# Altium PCB PCB1.PcbDoc
Units mm, origin at the board's own origin, x right, y up, seen from the top; angles counter-clockwise.
Board outline 152.4 x 101.6 mm, 2 copper layers (Top Layer, Bottom Layer); 6 components, 4 nets, 12 pads, 28 vias.
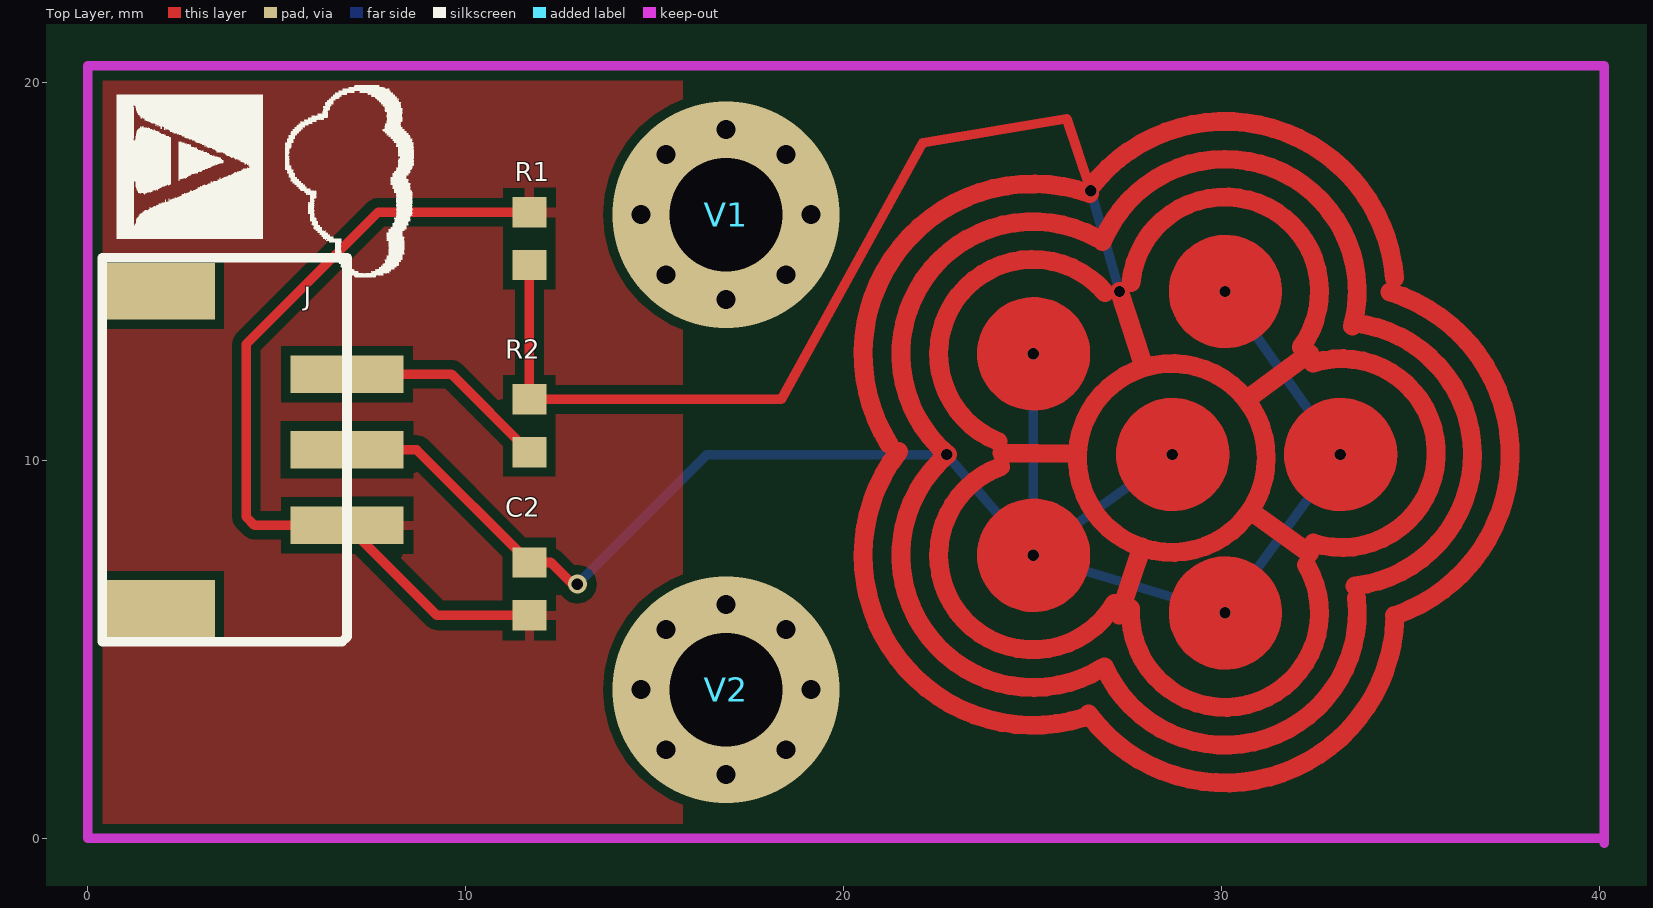
[diagram p0: Top Layer view]
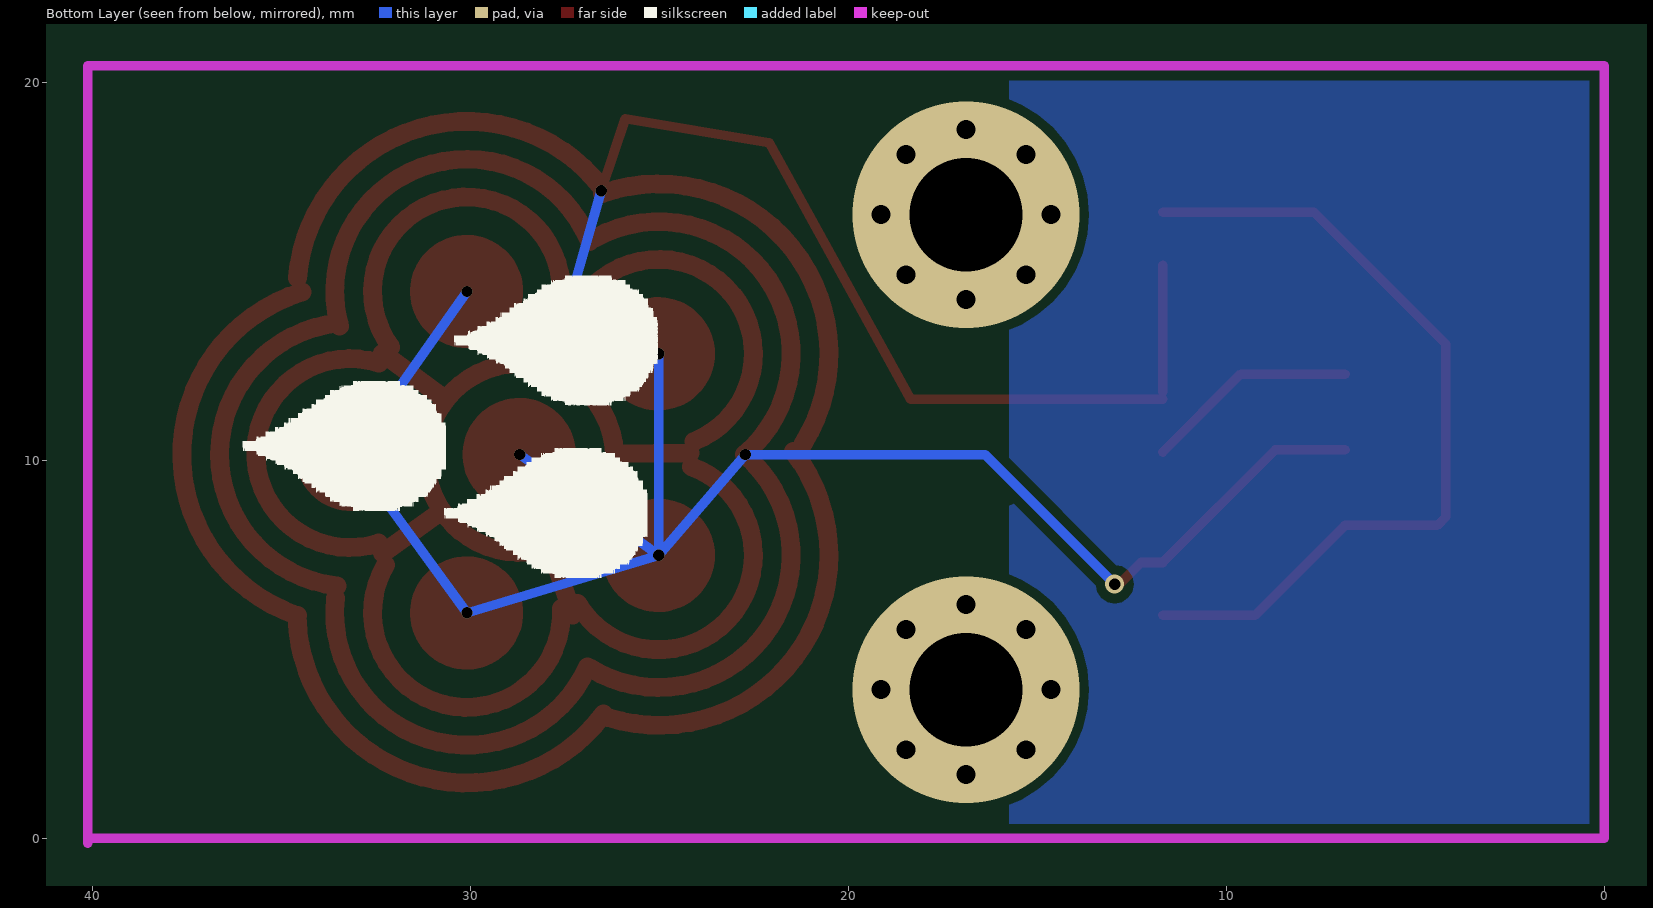
[diagram p1: Bottom Layer view, seen from below]

## Layer stack, top to bottom
Top Layer: signal copper 0.0356
Dielectric: dielectric 0.32, FR-4, Dk 4.8
Bottom Layer: signal copper 0.0356

## Board outline
-37.084,-41.275 115.316,-41.275 115.316,60.325 -37.084,60.325

## Design rules (kind name [scope] priority, off if disabled: settings)
Clearance [All] p1: gap=0.254
PolygonConnect [All] p1: connectstyle=Relief reliefconductorwidth=0.254 reliefentries=4 polygonreliefangle="90 Angle"
RoutingVias [All] p1: holewidth=0.711 width=1.27 viastyle="Through Hole" minholewidth=0.711 minwidth=1.27 maxholewidth=0.711 maxwidth=1.27
SilkscreenOverComponentPads [All] p1: minsilkscreentomaskgap=0.254
SolderMaskExpansion [All] p1: expansion=0.102
Width [All] p1: maxlimit=0.254 minlimit=0.254 preferedwidth=0.254
27 further rules are at their usual default settings.

## Components (designator, comment, footprint, x,y, rotation, side; value= is the part's Value field where it differs from the comment)
C2 "32pF" 1608[0603] 11.684,6.604 r90 top
J "sh-2.0" sh-2.0 6.858,10.287 r270 top
R1 "100K" 1608[0603] 11.684,15.875 r270 top
R2 "470" 1608[0603] 11.684,10.922 r270 top
V1 "Via" VIA 16.891,16.51 r0 top
V2 "Via" VIA 16.891,3.937 r0 top

## Footprints (in the part's own frame and the unit in brackets; to place one, negate y for a bottom-side part, rotate by r counter-clockwise, add the part's x,y. Pads: shape width x height; smd on the part's side, far side on the other; paste and mask are expansions set on the pad)
1608[0603] [mm] "Chip Capacitor, Body 1.6x0.8mm, IPC High Density"
  rect 0.8x0.9 smd: 1(-0.7,0) 2(0.7,0)
  body extent -0.87,-0.48 0.87,0.48, height 1.3
sh-2.0 [mm]
  rect 1x3 smd: 1(-2,0) 2(0,0) 3(2,0) 3(2,0)
  rect 1.5x3 smd: GND(-4.2,-5) GND(4.2,-5)
  silkscreen extent -5.08,-6.48 5.08,0
VIA [mm]

## Part data
C2: library part CAP
R1 R2: library part RES

## Via types
v1: diameter 1, hole 0.5, Top Layer to Bottom Layer, 16 vias
v2: diameter 0.3, hole 0.3, Top Layer to Bottom Layer, 9 vias
v3: diameter 6, hole 3, Top Layer to Bottom Layer, 2 vias
v4: diameter 0.5, hole 0.3, Top Layer to Bottom Layer, 1 vias

## Nets (pads, with @x,y where several pads share a name; then routed paths per layer and width w, separated by ;. In a path a pad name is that pad's centre, name@x,y a point inside that pad or via, vN(x,y) a via of type N, cw(c..) or ccw(c..) an arc to the next point about the centre after c; other vN are vias at no path point)
GND: C2.1 J.3 R1.1 | length 22.1
  Top Layer w0.254: C2.1 9.241,5.904 6.858,8.287 4.413,8.287 4.191,8.509 4.191,13.081 7.685,16.575 R1.1
NetC1_1: R1.2 R2.1 | length 154.1
  Top Layer w0.254: R2.1 18.353,11.622 22.098,18.415 25.908,19.05 26.522,17.208 v2(26.543,17.145) ; R2.1@11.684,11.811 R1.2
  Top Layer w0.5: 21.203,10.442 cw(c25.019,12.827) v2@26.517,17.07 ; 21.458,10.245 ccw(c25.019,7.493) 26.361,3.198 ; 24.091,10.506 cw(c25.019,12.827) 26.917,14.454 ; 24.155,9.839 ccw(c25.019,7.493) 27.174,6.225 ; 24.19,10.198 26.163,10.181 ; 26.484,3.289 ccw(c30.099,5.969) 34.598,5.862 ; v2@26.499,17.178 cw(c30.099,14.478) 26.522,17.208 cw(c30.099,14.478) 34.585,14.832 ; 27.299,5.918 27.895,7.72 ; v2(27.305,14.478) 27.902,12.641 ; 27.602,6.085 ccw(c30.099,5.969) 32.254,7.237 ; 27.61,14.715 cw(c30.099,14.478) 32.115,13 ; 30.801,8.652 32.331,7.553 ; 30.805,11.715 32.331,12.843 ; 32.429,12.579 cw(c33.19,10.198) 32.436,7.814 ; 34.471,14.461 cw(c33.147,10.16) 34.586,5.896 ; 31.19,10.071 ccw(c28.69,10.071) 31.19,10.071
  Bottom Layer w0.254: v2(26.543,17.145) v2(27.305,14.478)
NetC1_2: C2.2 J.2 | length 127.7
  Top Layer w0.254: J.2 8.701,10.287 C2.2 12.254,7.304 12.827,6.731 v4(12.954,6.731)
  Top Layer w0.5: 26.706,15.894 ccw(c25.019,12.827) 22.752,10.16 ccw(c25.019,7.493) 26.853,4.512 ; 26.86,15.803 cw(c30.099,14.478) 33.498,13.642 ; 26.906,4.536 ccw(c30.099,5.969) 33.578,6.355 ; 33.476,13.557 ccw(c30.099,14.478) 33.498,13.642 ; 33.484,13.644 cw(c33.147,10.16) 33.498,13.642 ; 33.541,6.682 ccw(c33.147,10.16) 33.498,13.642
  Top Layer w1.5: 25.781,7.493 ccw(c25.031,7.493) 25.781,7.493 ; 25.781,12.827 ccw(c25.031,12.827) 25.781,12.827 ; 29.464,10.16 ccw(c28.714,10.16) 29.464,10.16 ; 30.861,5.969 ccw(c30.111,5.969) 30.861,5.969 ; 30.861,14.478 ccw(c30.111,14.478) 30.861,14.478 ; 33.909,10.16 ccw(c33.159,10.16) 33.909,10.16
  Bottom Layer w0.254: v4(12.954,6.731) 16.383,10.16 v2(22.733,10.16) v2(25.019,7.493) ; v2(25.019,12.827) v2(25.019,7.493) ; v2(28.702,10.16) v2(25.019,7.493) ; v2(30.099,14.478) v2(33.147,10.16) v2(30.099,5.969) v2(25.019,7.493)
NetJ_3: J.1 R2.2 | length 5.7
  Top Layer w0.254: J.1 9.619,12.287 R2.2
pads on no net: J.GND
copper on no net:
  other v1: 16.891,1.687 15.3,2.346 18.482,2.346 14.641,3.937 19.141,3.937 15.3,5.528 18.482,5.528 16.891,6.187 16.891,14.26 15.3,14.919 18.482,14.919 14.641,16.51 19.141,16.51 15.3,18.101 18.482,18.101 16.891,18.76
  other v3: 16.891,3.937 16.891,16.51

## Polygon pours and split planes (outlines as drawn)
GND on Top Layer "Top Layer-No Net" (solid, pour order 2): 0,20.447 15.748,20.447 15.748,0 0,0
GND on Bottom Layer "Top Layer-No Net" (solid, pour order 4): 0,20.447 15.748,20.447 15.748,0 0,0

## Keep-outs
Keep-Out Layer:
  lines w0.254: 40,0 0,0 0,20.447 40.127,20.447 ; 40.132,-0.127 40.132,20.447

## Silkscreen, mask and mechanical layers (free items; w line width, h text height)
Top Overlay:
  drawing of 6090 lines, arcs and shapes, not listed
Bottom Overlay:
  drawing of 2232 lines, arcs and shapes, not listed
Top Solder:
  circle w0.5: c28.69,10.071 r2.5
  circle w1.5: c30.111,14.478 r0.75
  circle w1.5: c28.714,10.16 r0.75
  circle w1.5: c30.111,5.969 r0.75
  circle w1.5: c25.031,7.493 r0.75
  circle w1.5: c33.159,10.16 r0.75
  circle w1.5: c25.031,12.827 r0.75
  lines w0.1: 32.331,12.843 32.331,12.9
  lines w0.5: 21.203,10.442 cw(c25.019,12.827) 26.517,17.07 ; 21.458,10.245 ccw(c25.019,7.493) 26.361,3.198 ; 24.091,10.506 cw(c25.019,12.827) 26.917,14.454 ; 24.155,9.839 ccw(c25.019,7.493) 27.174,6.225 ; 24.19,10.198 26.163,10.181 ; 26.484,3.289 ccw(c30.099,5.969) 34.598,5.862 ; 26.499,17.178 cw(c30.099,14.478) 34.585,14.832 ; 26.706,15.894 ccw(c25.019,12.827) 22.752,10.16 ccw(c25.019,7.493) 26.853,4.512 ; 26.86,15.803 cw(c30.099,14.478) 33.476,13.557 ; 26.906,4.536 ccw(c30.099,5.969) 33.578,6.355 ; 27.299,5.918 27.895,7.72 ; 27.299,14.478 27.896,12.641 ; 27.602,6.085 ccw(c30.099,5.969) 32.254,7.237 ; 27.61,14.715 cw(c30.099,14.478) 32.115,13 ; 30.801,8.652 32.331,7.553 ; 30.805,11.715 32.331,12.843 ; 32.429,12.579 cw(c33.19,10.198) 32.436,7.814 ; 33.484,13.644 cw(c33.147,10.16) 33.541,6.682 ; 34.471,14.461 cw(c33.147,10.16) 34.586,5.896
  text "Steam Sensor" at 12.7,2.286 h1 r180